# Altium PCB LLY.PcbDoc (part 2 of 2)
Units mm, origin at the board's own origin, x right, y up, seen from the top; angles counter-clockwise.
Board outline 253.36 x 130.77 mm, 2 copper layers (Top Layer, Bottom Layer), stack 0.325 mm thick; 280 components, 206 nets, 985 pads, 247 vias.
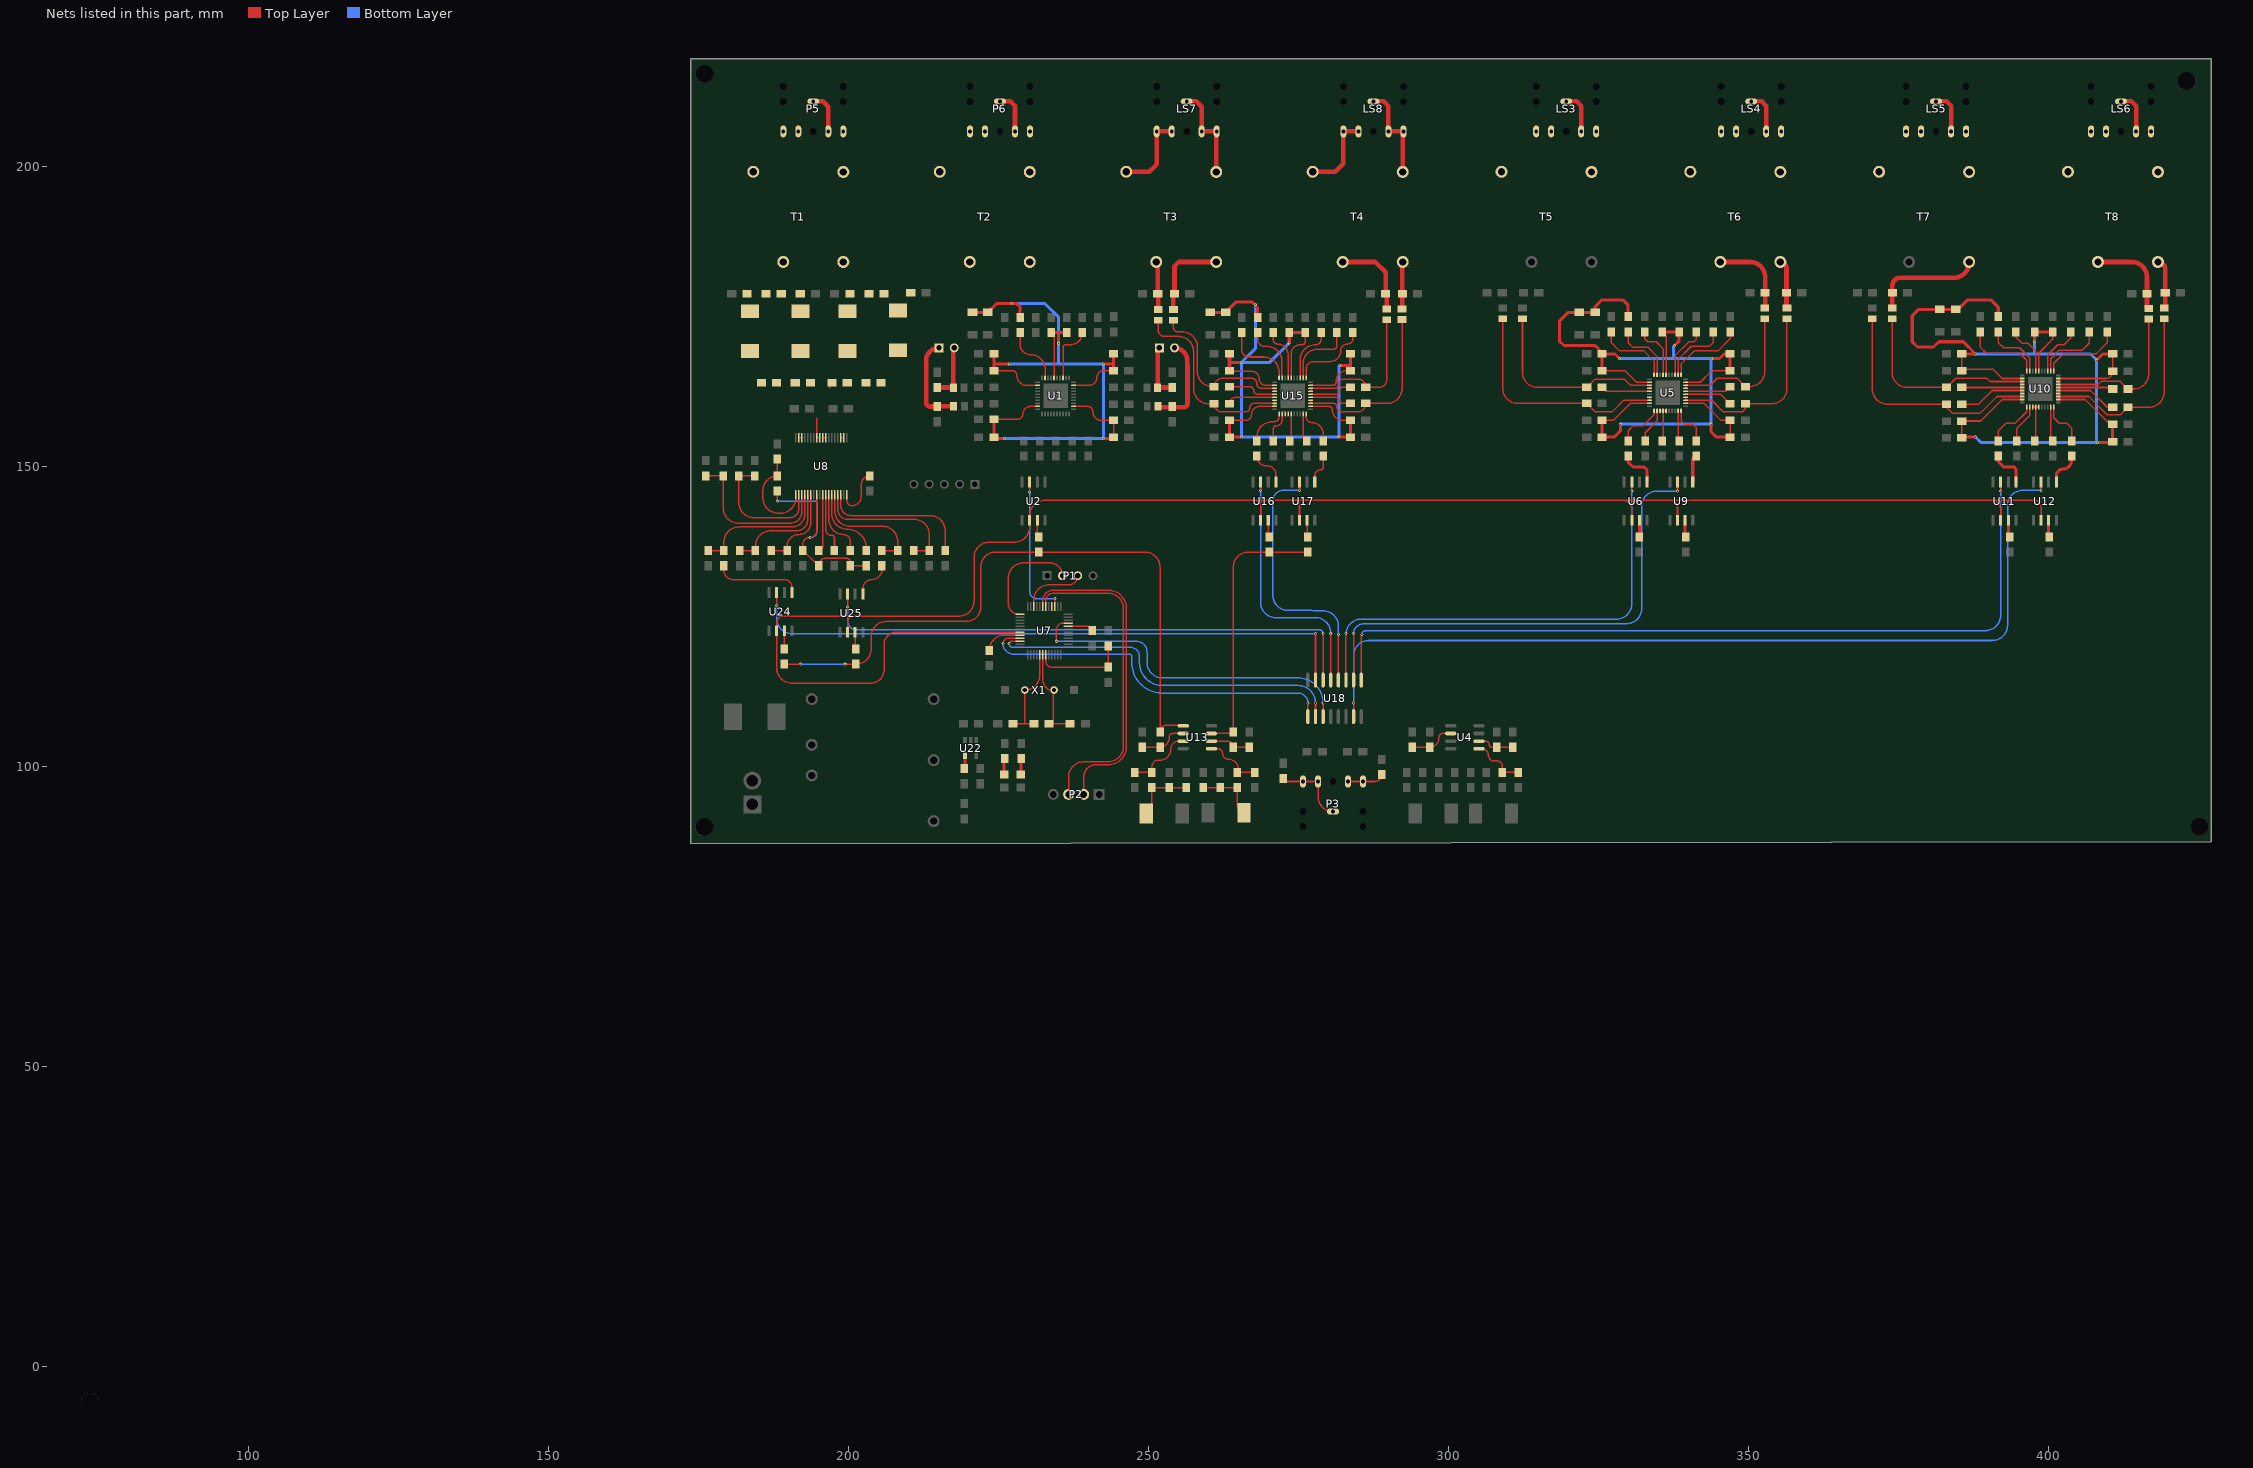
[diagram p2: the nets of this part, all layers, seen from the top]

## Via types
v1: diameter 1.016, hole 0.508, Top Layer to Bottom Layer, 114 vias
v2: diameter 0.508, hole 0.254, Top Layer to Bottom Layer, 96 vias
v3: diameter 0.381, hole 0.254, Top Layer to Bottom Layer, 29 vias
v4: diameter 0.762, hole 0.508, Top Layer to Bottom Layer, 5 vias
v5: diameter 1.016, hole 0.711, Top Layer to Bottom Layer, 3 vias

## Nets (pads, with @x,y where several pads share a name; then routed paths per layer and width w, separated by ;. In a path a pad name is that pad's centre, name@x,y a point inside that pad or via, vN(x,y) a via of type N, cw(c..) or ccw(c..) an arc to the next point about the centre after c; other vN are vias at no path point) (continued)
NetC35_2: C35.2 L13.1 U5.37 U5.38 | length 39.4
  Top Layer w0.254: L13.1@309.067,174.65 309.067,163.068 ccw(c311.607,163.068) 311.607,160.528 C35.2@323.088,160.528 324.485,159.131 327.279,159.131 329.204,161.056 U5.38@333.55,161.056 U5.37@333.55,161.556
NetC36_1: C36.1 L14.1 U5.33 U5.34 | length 33.1
  Top Layer w0.254: L14.1@312.369,174.65 312.369,165.735 ccw(c314.909,165.735) 314.909,163.195 C36.1@323.088,163.195 324.485,164.592 329.311,164.592 330.347,163.556 U5.33@333.55,163.556 U5.34@333.55,163.056
NetC36_2: C36.2 U5.35 | length 8.2
  Top Layer w0.254: C36.2@325.628,163.195 326.267,162.556 U5.35@333.55,162.556
NetC38_1: C38.1 U5.1 | length 7.8
  Top Layer w0.254: C38.1@329.982,154.305 329.982,155.992 330.835,156.845 332.486,156.845 334.3,158.659 U5.1@334.3,159.306
NetC38_2: C38.2 U6.5 | length 6.7
  Top Layer w0.508: C38.2@329.982,151.765 329.982,150.743 330.773,149.952 332.648,149.952 333.121,149.479 U6.5@333.121,147.447
NetC39_2: C39.2 U5.30 | length 12.5
  Top Layer w0.254: C39.2@327.152,172.466 327.152,170.688 328.549,169.291 332.613,169.291 334.3,167.604 U5.30@334.3,165.306
NetC40_1: C40.1 R16.1 U4.5 | length 9.2
  Top Layer w0.254: U4.5@305.118,102.997 305.562,102.997 cw(c305.562,101.854) 306.705,101.854 ccw(c307.594,101.854) 307.594,100.965 308.102,100.965 cw(c308.102,100.058) 309.009,100.058 R16.1@309.009,99.06 C40.1@311.658,99.06
NetC41_1: C41.1 U6.3 | length 2.8
  Top Layer w0.508: C41.1@331.851,138.303 U6.3@331.851,141.097
NetC42_2: C42.2 R25.1 U7.5 X1.2 | length 16
  Top Layer w0.254: C42.2@227.457,107.188 229.362,107.188 ; R25.1@230.95,107.188 229.362,107.188 ; U7.5@231.93,118.275 231.93,115.271 cw(c229.435,115.271) X1.2@229.435,112.776 229.435,107.261 cw(c229.362,107.261) 229.362,107.188
NetC43_2: C43.2 R25.2 U7.6 X1.1 | length 15.4
  Top Layer w0.254: U7.6@232.43,118.275 232.43,114.534 ccw(c234.315,114.534) X1.1@234.188,112.653 ; R25.2@233.807,107.188 R25.2@234.188,107.188 ; X1.1@234.315,112.776 ccw(c234.315,112.649) X1.1@234.188,112.653 ; C43.2@236.982,107.188 R25.2@234.188,107.188 ; R25.2@234.188,107.188 234.188,112.649 cw(c234.315,112.649) X1.1@234.188,112.653
NetC44_1: C44.1 R27.1 U7.7 | length 15.6
  Top Layer w0.254: U7.7@232.914,118.657 232.914,117.606 ccw(c233.934,117.606) 232.93,117.426 ccw(c233.934,117.606) 233.934,116.586 C44.1@243.332,116.586 R27.1@243.332,120.142
NetC45_1: C45.1 U5.2 | length 5.8
  Top Layer w0.254: C45.1@332.813,154.305 332.813,155.648 334.8,157.635 U5.2@334.8,159.306
NetC46_1: C46.1 R33.2 U8.20 | length 21.7
  Top Layer w0.254: C46.1@184.404,148.463 R33.2@181.788,148.463 181.788,144.018 ccw(c184.328,144.018) 184.328,141.478 190.246,141.478 ccw(c190.246,143.003) 191.771,143.003 U8.20@191.771,145.313
NetC47_2: C47.2 R34.2 U8.21 | length 26.7
  Top Layer w0.254: C47.2@176.276,148.463 R34.2@179.172,148.463 179.172,143.129 ccw(c181.712,143.129) 181.712,140.589 190.373,140.589 ccw(c190.373,142.487) 192.271,142.487 U8.21@192.271,145.313
NetC48_2: C48.2 R35.2 U8.19 | length 16.8
  Top Layer w0.254: C48.2@188.214,151.257 R35.2@188.214,148.463 ccw(c188.214,146.05) 185.801,146.05 185.801,144.78 ccw(c188.341,144.78) 188.341,142.24 188.731,142.24 ccw(c188.731,144.78) 191.271,144.78 U8.19@191.271,145.313
NetC49_1: C49.1 C50.2 U8.22 | length 23.4
  Top Layer w0.254: C49.1@176.657,136.017 C50.2@179.29,136.017 179.29,137.414 cw(c181.83,137.414) 181.83,139.954 190.627,139.954 ccw(c190.627,142.098) 192.771,142.098 U8.22@192.771,145.313
NetC49_N_2: C49_N.2 C50_N.2 U8.23 | length 18.7
  Top Layer w0.254: C49_N.2@181.923,136.017 C50_N.2@184.556,136.017 184.556,136.779 cw(c187.096,136.779) 187.096,139.319 191.389,139.319 ccw(c191.389,141.201) 193.271,141.201 U8.23@193.271,145.313
NetC50_1: C50.1 U24.5 | length 14.6
  Top Layer w0.254: C50.1@179.29,133.477 179.29,132.715 ccw(c180.814,132.715) 180.814,131.191 189.357,131.191 cw(c189.357,129.921) 190.627,129.921 U24.5@190.627,129.032
NetC51_1: C51.1 C53.1 L1.2 T1.1
NetC53_2: C53.2 C56.2 L2.2 T1.2
NetC54_1: C54.1 R35.1 R38.1 RG1.1 RG2.1 U8.26 | length 38.7
  Top Layer w0.254: v2(188.214,144.272) R35.1@188.214,145.923 ; U8.26@194.771,145.313 194.771,139.399 cw(c193.548,139.399) 193.548,138.176 ccw(c193.548,137.084) 192.456,137.084 C54.1@192.456,136.017 R38.1@195.072,133.477 cw(c196.342,133.477) 196.342,134.747 199.644,134.747 cw(c199.644,134.036) 200.355,134.036 RG1.1@200.355,133.477 RG2.1@202.988,133.477
  Bottom Layer w0.254: v2(188.214,144.272) 194.437,144.272 cw(c194.437,143.891) 194.818,143.891 194.818,139.319 cw(c193.675,139.319) v2(193.675,138.176)
NetC55_1: C55.1 R36.2
NetC55_2: C55.2 L2.1 U8.10 U8.11 | length 3.8
  Top Layer w0.254: 194.771,158.077 U8.11@194.771,154.813 U8.10@195.271,154.813
NetC57_2: C57.2 R37.2 U8.24 | length 14.2
  Top Layer w0.254: R37.2@187.19,136.017 C57.2@189.823,136.017 189.823,136.737 cw(c191.77,136.737) 191.77,138.684 ccw(c191.77,140.685) 193.771,140.685 U8.24@193.771,145.313
NetC58_1: C58.1 U8.29 | length 10.1
  Top Layer w0.254: U8.29@196.271,145.313 196.271,139.517 ccw(c197.231,139.517) 197.231,138.557 cw(c197.231,138.066) 197.722,138.066 C58.1@197.722,136.017
NetC59_1: C59.1 C62.1 L3.2 T2.1 | length 0.1
  Top Layer w0.254: C62.1@202.76,178.816 cw(c202.76,178.757) C62.1@202.819,178.757
NetC60_1: C60.1 U25.5 | length 6.9
  Top Layer w0.254: U25.5@202.438,128.397 U25.5@202.438,128.778 202.438,129.667 cw(c203.962,129.667) 203.962,131.191 ccw(c203.962,132.85) 205.621,132.85 C60.1@205.621,133.477
NetC60_2: C60.2 C63.1 U8.32 | length 20.2
  Top Layer w0.254: U8.32@197.771,145.313 197.771,142.589 ccw(c200.279,142.589) 200.279,140.081 205.715,140.081 cw(c205.715,137.541) 208.255,137.541 C63.1@208.255,136.017 C60.2@205.621,136.017
NetC60_N_2: C60_N.2 C63_N.1 U8.33 | length 25.4
  Top Layer w0.254: U8.33@198.271,145.313 198.271,142.851 ccw(c199.898,142.851) 199.898,141.224 210.981,141.224 cw(c210.981,138.684) 213.521,138.684 C63_N.1@213.521,136.017 C60_N.2@210.888,136.017
NetC62_2: C62.2 C65.2 L4.2 T2.2
NetC64_1: C64.1 R39.2
NetC64_2: C64.2 L4.1 U8.2 U8.3 | length 0.5
  Top Layer w0.254: U8.3@198.771,154.813 U8.2@199.271,154.813
NetC66_1: C66.1 U8.34 | length 24.9
  Top Layer w0.254: U8.34@198.771,145.313 198.771,143.494 ccw(c200.406,143.494) 200.406,141.859 213.614,141.859 cw(c213.614,139.319) 216.154,139.319 C66.1@216.154,136.017
NetC67_1: C67.1 U8.36 | length 8.9
  Top Layer w0.254: U8.36@199.771,145.313 199.771,144.399 ccw(c200.66,144.399) 200.66,143.51 ccw(c200.66,145.034) 202.184,145.034 202.184,147.066 cw(c203.581,147.066) C67.1@203.581,148.463
NetC68_1: C68.1 U25.3 | length 2.9
  Top Layer w0.254: U25.3@201.168,122.428 201.168,119.761 ccw(c201.295,119.761) C68.1@201.295,119.634
NetC69_1: C69.1 U16.3 | length 2.9
  Top Layer w0.254: U16.3@270.002,141.097 270.002,138.43 ccw(c270.129,138.43) C69.1@270.129,138.303
NetC70_1: C70.1@276.606,138.303 U17.3 | length 2.9
  Top Layer w0.254: U17.3@276.479,141.097 276.479,138.43 ccw(c276.606,138.43) C70.1@276.606,138.303
NetC70_2: C70.2@189.357,119.634 U24.3 | length 3
  Top Layer w0.254: C70.2@189.357,119.634 U24.3@189.357,122.682
NetC71_1: C71.1 U2.3 | length 2.9
  Top Layer w0.254: U2.3@231.521,141.097 231.521,138.557 ccw(c231.775,138.557) C71.1@231.775,138.303
NetC73_1: C73.1 U5.3 U5.4 U5.5 | length 6.1
  Top Layer w0.254: U5.3@335.3,159.306 U5.5@336.3,159.306 ; C73.1@335.643,154.305 335.8,154.462 U5.4@335.8,159.306
NetC74_2: C74.2 U5.27 | length 9.2
  Top Layer w0.254: C74.2@332.74,172.466 332.74,171.323 333.248,170.815 334.645,170.815 335.8,169.66 U5.27@335.8,165.306
NetC77_1: C77.1 U9.3 | length 2.9
  Top Layer w0.508: U9.3@339.471,141.097 339.471,138.43 ccw(c339.598,138.43) C77.1@339.598,138.303
NetC78_1: C78.1 U5.9 | length 5.1
  Top Layer w0.254: U5.9@338.3,159.306 338.3,154.478 C78.1@338.473,154.305
NetC79_2: C79.2 U5.22 | length 11.4
  Top Layer w0.254: U5.22@338.3,165.306 338.3,167.866 340.487,170.053 343.535,170.053 344.134,170.652 C79.2@344.134,172.466
NetC80_1: C80.1 L5.1 LS1.1 | length 15.4
  Top Layer w0.762: LS1.1@215.138,169.799 ccw(c215.138,167.64) 212.979,167.64 212.979,160.655 ccw(c213.614,160.655) 213.614,160.02 C80.1@214.884,160.02 ccw(c214.884,160.071) 214.935,160.071 L5.1@217.576,160.071
NetC81_2: C81.2 L6.2 LS1.2 | length 9.4
  Top Layer w0.762: C81.2@214.884,163.195 217.475,163.195 cw(c217.475,163.144) L6.2@217.526,163.144 217.526,169.647 cw(c217.678,169.647) LS1.2@217.678,169.799
NetC82_1: C82.1 L7.1 LS2.1 | length 9.3
  Top Layer w0.762: LS2.1@251.841,169.799 ccw(c251.841,169.52) 251.562,169.52 L7.1@251.562,163.144 cw(c251.612,163.144) 251.612,163.195 C82.1@254,163.195
NetC83_2: C83.2 L8.2 LS2.2 | length 15.9
  Top Layer w0.762: L8.2@251.612,160.071 ccw(c251.79,160.071) 251.79,159.893 255.905,159.893 ccw(c255.905,160.528) 256.54,160.528 256.54,166.878 ccw(c254.381,166.878) 256.507,167.253 256.507,167.673 ccw(c254.381,167.673) LS2.2@254.381,169.799
NetC84_1: C84.1 L9.2 T3.1 | length 8.1
  Top Layer w0.762: T3.1@251.334,184.11 251.587,183.857 C84.1@251.587,178.816 251.663,178.74 L9.2@251.663,176.174
NetC85_2: C85.2 L10.2 T3.2 | length 14.5
  Top Layer w0.762: L10.2@254.203,176.174 254.203,178.638 C85.2@254.381,178.816 254.381,183.388 255.103,184.11 T3.2@261.334,184.11
NetC86_1: C86.1 L11.1 T4.1 | length 14.1
  Top Layer w0.762: T4.1@282.407,184.11 287.822,184.11 289.56,182.372 C86.1@289.56,178.816 289.738,178.638 L11.1@289.738,176.251
NetC87_2: C87.2 L12.2 T4.2 | length 7.9
  Top Layer w0.762: L12.2@292.303,176.301 292.303,178.765 C87.2@292.354,178.816 292.354,184.057 T4.2@292.407,184.11
NetC88_1: C88.1 U5.10 | length 6.9
  Top Layer w0.254: U5.10@338.8,159.306 338.8,157.643 339.344,157.099 340.741,157.099 341.303,156.537 C88.1@341.303,154.305
NetC88_2: C88.2 U9.5 | length 4.6
  Top Layer w0.508: U9.5@340.741,147.447 340.741,151.203 cw(c341.303,151.203) C88.2@341.303,151.765
NetC89_1: C89.1 U5.21 | length 12.8
  Top Layer w0.254: U5.21@338.8,165.306 338.8,167.096 340.995,169.291 344.932,169.291 346.964,171.323 C89.1@346.964,172.466
NetC92_1: C92.1 U5.15 | length 8.1
  Top Layer w0.254: U5.15@339.55,162.056 345.385,162.056 C92.1@346.964,160.477
NetC92_2: C92.2 L16.1 U5.13 U5.14 | length 32.3
  Top Layer w0.254: U5.14@339.55,161.556 U5.13@339.55,161.056 343.896,161.056 345.821,159.131 348.996,159.131 349.504,159.639 C92.2@349.504,160.477 353.898,160.477 ccw(c353.898,163.017) 356.438,163.017 L16.1@356.438,174.65
NetC93_1: C93.1 L15.2 U5.17 U5.18 | length 25
  Top Layer w0.254: U5.17@339.55,163.056 U5.18@339.55,163.556 343.642,163.556 344.805,164.719 348.107,164.719 C93.1@349.504,163.322 350.19,163.322 ccw(c350.19,165.862) 352.73,165.862 L15.2@352.73,174.65
NetC93_2: C93.2 U5.16 | length 7.7
  Top Layer w0.254: U5.16@339.55,162.556 346.198,162.556 C93.2@346.964,163.322
NetC96_1: C96.1 L15.1 T6.1 | length 14.1
  Top Layer w0.762: T6.1@345.335,184.11 350.266,184.11 cw(c350.266,181.57) 352.806,181.57 C96.1@352.806,178.943 352.806,176.505 cw(c352.73,176.505) L15.1@352.73,176.428
NetC97_2: C97.2 L16.2 T6.2 | length 8.3
  Top Layer w0.762: T6.2@355.335,184.11 cw(c355.335,183.083) 356.362,183.083 C97.2@356.362,178.943 356.362,176.505 ccw(c356.438,176.505) L16.2@356.438,176.428
NetC98_2: C98.2 L18.2 T7.2 | length 18.9
  Top Layer w0.762: L18.2@373.964,176.428 373.964,178.892 cw(c374.015,178.892) C98.2@374.015,178.943 374.015,180.213 cw(c375.285,180.213) 375.285,181.483 384.26,181.483 ccw(c384.26,184.023) 386.8,184.023 T7.2@386.8,184.11
NetC102_1: C102.1 U10.36 | length 11
  Top Layer w0.254: C102.1@385.572,160.401 388.366,160.401 390.656,162.691 U10.36@395.653,162.691
NetC102_2: C102.2 L17.1 U10.37 U10.38 | length 40.7
  Top Layer w0.254: L17.1@370.662,174.65 370.662,162.941 ccw(c373.202,162.941) 373.202,160.401 C102.2@383.032,160.401 383.032,159.893 384.048,158.877 388.62,158.877 391.434,161.691 U10.38@395.653,161.691 U10.37@395.653,162.191
NetC103_1: C103.1 L18.1 U10.33 U10.34 | length 33.4
  Top Layer w0.254: L18.1@373.964,174.65 373.964,165.735 ccw(c376.504,165.735) 376.504,163.195 C103.1@383.032,163.195 384.556,164.719 389.763,164.719 390.291,164.191 U10.33@395.653,164.191 U10.34@395.653,163.691
NetC103_2: C103.2 U10.35 | length 10.1
  Top Layer w0.254: C103.2@385.572,163.195 385.576,163.191 U10.35@395.653,163.191
NetC105_1: C105.1 U10.1 | length 8.5
  Top Layer w0.254: C105.1@391.65,154.305 391.65,155.938 392.938,157.226 394.462,157.226 396.403,159.167 U10.1@396.403,159.941
NetC105_2: C105.2 U11.5 | length 6.5
  Top Layer w0.508: C105.2@391.65,151.765 391.65,150.847 392.532,149.965 394.23,149.965 394.589,149.606 U11.5@394.589,147.447
NetC106_2: C106.2 U10.30 | length 13
  Top Layer w0.254: C106.2@388.62,172.466 388.62,169.926 389.636,168.91 395.224,168.91 396.403,167.731 U10.30@396.403,165.941
NetC107_1: C107.1 U11.3 | length 2.9
  Top Layer w0.508: U11.3@393.319,141.097 393.319,138.557 ccw(c393.573,138.557) C107.1@393.573,138.303
NetC108_1: C108.1 U10.2 | length 6.5
  Top Layer w0.254: C108.1@394.716,154.305 394.716,156.337 396.903,158.524 U10.2@396.903,159.941
NetC109_1: C109.1 U10.3 U10.4 U10.5 | length 6.7
  Top Layer w0.254: U10.3@397.403,159.941 U10.5@398.403,159.941 ; C109.1@397.71,154.305 397.903,154.498 U10.4@397.903,159.941
NetC110_2: C110.2 U10.27 | length 8.5
  Top Layer w0.254: C110.2@394.589,172.466 394.589,171.577 395.605,170.561 396.621,170.561 397.903,169.279 U10.27@397.903,165.941
NetC113_1: C113.1 U12.3 | length 2.9
  Top Layer w0.508: U12.3@400.05,141.097 400.05,138.43 ccw(c400.177,138.43) C113.1@400.177,138.303
NetC117_1: C117.1 U15.36 | length 8.2
  Top Layer w0.254: C117.1@263.525,160.477 cw(c264.596,160.477) 264.596,161.548 U15.36@271.066,161.548
NetC117_2: C117.2 L9.1 U15.37 U15.38 | length 32.9
  Top Layer w0.254: L9.1@251.663,174.523 L9.1@251.663,174.396 251.663,172.771 ccw(c252.73,172.771) 252.73,171.704 255.016,171.704 cw(c255.016,169.164) 257.556,169.164 257.556,163.017 ccw(c260.096,163.017) 260.096,160.477 C117.2@260.985,160.477 ccw(c262.331,160.477) 262.331,159.131 266.192,159.131 ccw(c266.192,159.893) 266.954,159.893 cw(c267.609,159.893) 267.609,160.548 U15.38@271.066,160.548 U15.37@271.066,161.048
NetC118_1: C118.1 L10.1 U15.33 U15.34 | length 27.7
  Top Layer w0.254: L10.1@254.203,174.396 254.203,173.152 ccw(c254.889,173.152) 254.889,172.466 255.651,172.466 cw(c255.651,169.926) 258.191,169.926 258.191,165.862 ccw(c260.731,165.862) 260.731,163.322 C118.1@260.985,163.322 cw(c262.382,163.322) 262.382,164.719 267.208,164.719 cw(c267.208,163.83) 268.097,163.83 ccw(c268.879,163.83) 268.879,163.048 U15.33@271.066,163.048 U15.34@271.066,162.548
NetC118_2: C118.2 U15.35 | length 8.3
  Top Layer w0.254: C118.2@263.525,163.322 266.954,163.322 cw(c266.954,162.687) 267.589,162.687 ccw(c268.228,162.687) 268.228,162.048 U15.35@271.066,162.048
NetC120_1: C120.1 U15.1 | length 6.7
  Top Layer w0.254: C120.1@268.097,154.305 268.097,154.94 cw(c270.637,154.94) 270.637,157.48 270.891,157.48 ccw(c270.891,158.405) 271.816,158.405 U15.1@271.816,158.798
NetC120_2: C120.2 U16.5 | length 6.2
  Top Layer w0.254: C120.2@268.097,151.765 ccw(c269.748,151.765) 269.748,150.114 269.875,150.114 cw(c269.875,148.717) 271.272,148.717 U16.5@271.272,147.447
NetC121_2: C121.2 U15.30 | length 12.2
  Top Layer w0.254: C121.2@265.557,172.339 265.557,169.545 ccw(c266.827,169.545) 266.827,168.275 269.276,168.275 cw(c269.276,165.735) 271.816,165.735 U15.30@271.816,164.798
NetC122_1: C122.1 U15.2 | length 5.3
  Top Layer w0.254: C122.1@270.859,154.305 270.859,156.305 cw(c271.399,156.305) 271.399,156.845 ccw(c271.399,157.762) 272.316,157.762 U15.2@272.316,158.798
NetC123_1: C123.1 U15.3 U15.4 U15.5 | length 5.1
  Top Layer w0.254: C123.1@273.284,154.642 ccw(c273.621,154.642) C123.1@273.621,154.305 ccw(c273.621,154.5) 273.816,154.5 U15.5@273.816,158.798
NetC124_2: C124.2 U15.27 | length 8.9
  Top Layer w0.254: C124.2@270.855,172.339 270.855,171.105 ccw(c271.526,171.105) 271.526,170.434 cw(c271.526,168.644) 273.316,168.644 U15.27@273.316,164.798
NetC127_1: C127.1 U15.9 | length 4.8
  Top Layer w0.254: U15.9@275.816,158.798 275.816,154.873 ccw(c276.384,154.873) C127.1@276.384,154.305
NetC128_2: C128.2 U15.22 | length 11.9
  Top Layer w0.254: U15.22@275.816,164.798 275.816,167.197 cw(c278.164,167.197) 278.164,169.545 280.797,169.545 ccw(c280.797,170.198) 281.45,170.198 C128.2@281.45,172.339
NetC129_1: C129.1 U15.10 | length 6.1
  Top Layer w0.254: U15.10@276.316,158.798 276.316,158.278 ccw(c277.241,158.278) 277.241,157.353 cw(c277.241,155.448) 279.146,155.448 C129.1@279.146,154.305
NetC129_2: C129.2 U17.5 | length 5.1
  Top Layer w0.254: U17.5@277.749,147.447 277.749,148.463 cw(c278.765,148.463) 278.765,149.479 ccw(c278.765,149.86) 279.146,149.86 C129.2@279.146,151.765
NetC130_1: C130.1 U15.21 | length 13.1
  Top Layer w0.254: U15.21@276.316,164.798 276.316,166.243 cw(c277.586,166.243) 277.586,167.513 280.289,167.513 ccw(c280.289,169.291) 282.067,169.291 cw(c283.21,169.291) 283.21,170.434 ccw(c283.21,171.323) 284.099,171.323 C130.1@284.099,172.339
NetC132_1: C132.1 U15.15 | length 7.2
  Top Layer w0.254: U15.15@277.066,161.548 281.301,161.548 cw(c281.301,161.036) 281.813,161.036 ccw(c282.321,161.036) 282.321,160.528 C132.1@283.718,160.528
NetC132_2: C132.2 L12.1 U15.13 U15.14 | length 30.2
  Top Layer w0.254: U15.14@277.066,161.048 U15.13@277.066,160.548 280.904,160.548 cw(c280.904,160.02) 281.432,160.02 ccw(c282.321,160.02) 282.321,159.131 284.861,159.131 ccw(c284.861,160.528) C132.2@286.258,160.528 289.763,160.528 ccw(c289.763,163.068) 292.303,163.068 L12.1@292.303,174.523
NetC133_1: C133.1 L11.2 U15.17 U15.18 | length 25.5
  Top Layer w0.254: U15.17@277.066,162.548 U15.18@277.066,163.048 281.031,163.048 ccw(c281.031,163.83) 281.813,163.83 cw(c282.575,163.83) 282.575,164.592 284.912,164.592 cw(c284.912,163.246) C133.1@286.258,163.246 288.544,163.246 ccw(c288.544,164.44) 289.738,164.44 L11.2@289.738,174.473
NetC133_2: C133.2 U15.16 | length 7.3
  Top Layer w0.254: U15.16@277.066,162.048 281.301,162.048 ccw(c281.301,162.56) 281.813,162.56 cw(c282.499,162.56) 282.499,163.246 C133.2@283.718,163.246
NetC137_1: C137.1 U10.9 | length 5.8
  Top Layer w0.254: U10.9@400.403,159.941 400.403,154.641 C137.1@400.739,154.305
NetC138_2: C138.2 U10.22 | length 11.4
  Top Layer w0.254: U10.22@400.403,165.941 400.403,167.993 401.828,169.418 405.638,169.418 406.799,170.579 C138.2@406.799,172.466
NetC139_1: C139.1 U10.10 | length 7.6
  Top Layer w0.254: U10.10@400.903,159.941 400.903,158.151 401.828,157.226 403.098,157.226 403.86,156.464 C139.1@403.86,154.305
NetC139_2: C139.2 U12.5 | length 5.8
  Top Layer w0.508: U12.5@401.32,147.447 401.32,148.463 cw(c402.463,148.463) 402.463,149.606 ccw(c402.463,151.003) 403.86,151.003 C139.2@403.86,151.765
NetC140_1: C140.1 U10.21 | length 13.4
  Top Layer w0.254: U10.21@400.903,165.941 400.903,167.223 402.463,168.783 407.924,168.783 409.829,170.688 C140.1@409.829,172.466
NetC143_1: C143.1 U10.15 | length 10.2
  Top Layer w0.254: U10.15@401.653,162.691 407.031,162.691 409.829,159.893 C143.1@410.718,159.893
NetC143_2: C143.2 L20.1 U10.13 U10.14 | length 33.6
  Top Layer w0.254: U10.14@401.653,162.191 U10.13@401.653,161.691 406.761,161.691 409.829,158.623 411.988,158.623 C143.2@413.258,159.893 416.763,159.893 ccw(c416.763,162.433) 419.303,162.433 L20.1@419.303,174.65
NetC144_1: C144.1 L19.2 U10.17 U10.18 | length 26.9
  Top Layer w0.254: U10.18@401.653,164.191 U10.17@401.653,163.691 408.293,163.691 408.813,164.211 411.988,164.211 C144.1@413.258,162.941 414.198,162.941 ccw(c414.198,165.481) 416.738,165.481 L19.2@416.738,174.6
NetC144_2: C144.2 U10.16 | length 9.2
  Top Layer w0.254: U10.16@401.653,163.191 410.468,163.191 cw(c410.468,162.941) C144.2@410.718,162.941
NetC147_1: C147.1 L19.1 T8.1 | length 15
  Top Layer w0.762: T8.1@408.264,184.11 413.893,184.11 cw(c413.893,181.57) 416.433,181.57 C147.1@416.433,178.816 416.433,176.682 ccw(c416.738,176.682) L19.1@416.738,176.378
NetC148_2: C148.2 L20.2 T8.2 | length 8.5
  Top Layer w0.762: T8.2@418.264,184.11 cw(c418.264,182.893) 419.481,182.893 C148.2@419.481,178.943 419.481,176.606 cw(c419.303,176.606) L20.2@419.303,176.428
NetC149_1: C149.1 R21.1 R23.2 R28.2 | length 10.6
  Top Layer w0.254: C149.1@249.682,92.202 ccw(c249.682,93.145) 250.625,93.145 R23.2@250.625,96.52 R28.2@253.474,96.52 R21.1@256.322,96.52
NetC150_1: C150.1 R23.1 U13.3 | length 11.4
  Top Layer w0.254: C150.1@247.777,99.06 R23.1@250.625,99.06 250.625,100.003 cw(c251.714,100.003) 251.714,101.092 251.968,101.092 ccw(c251.968,102.87) 253.746,102.87 cw(c255.143,102.87) 255.143,104.267 U13.3@255.841,104.267
NetC151_1: C151.1 R31.1 U13.5 | length 9.6
  Top Layer w0.254: U13.5@260.541,102.997 261.62,102.997 cw(c261.62,102.235) 262.382,102.235 ccw(c263.398,102.235) 263.398,101.219 cw(c263.398,99.568) 265.049,99.568 265.049,99.06 C151.1@267.716,99.06
NetC152_1: C152.1 R31.2 R32.1 R40.2 | length 10.5
  Top Layer w0.254: R32.1@259.207,96.52 R40.2@262.019,96.52 R31.2@264.868,96.52 264.868,93.399 ccw(c265.938,93.399) C152.1@265.938,92.329
NetC166_2: C166.2 U22.4 | length 2.2
  Top Layer w0.508: C166.2@219.329,99.695 ccw(c219.329,99.827) 219.461,99.827 U22.4@219.461,101.794
NetD1_1: D1.1 R22.1 | length 3.1
  Top Layer w0.508: R22.1@225.933,101.727 225.933,98.733 ccw(c226.015,98.733) D1.1@226.015,98.651
NetD2_1: D2.1 R17.1 | length 3
  Top Layer w0.508: D2.1@228.727,98.905 ccw(c228.727,98.987) 228.809,98.987 R17.1@228.809,101.854
NetL1_1: L1.1 R36.1 U8.16 U8.17 | length 0.5
  Top Layer w0.254: U8.17@191.771,154.813 U8.16@192.271,154.813
NetL3_1: L3.1 R39.1 U8.8 U8.9 | length 1.9
  Top Layer w0.254: U8.9@195.771,154.813 U8.8@196.271,154.813 ; 196.906,163.166 cw(c197.824,163.166) R39.1@197.824,164.084
NetLS3_1: LS3.1 T5.3 | length 7
  Top Layer w0.762: LS3.1@319.659,210.867 321.39,210.867 322.159,210.098 LS3.1@322.159,205.867
NetLS3_2: LS3.2 T5.4
NetLS4_1: LS4.1 T6.3 | length 7
  Top Layer w0.762: LS4.1@350.478,210.867 352.209,210.867 352.978,210.098 LS4.1@352.978,205.867
NetLS4_2: LS4.2 T6.4
NetLS5_1: LS5.1 T7.3 | length 7
  Top Layer w0.762: LS5.1@381.296,210.867 383.027,210.867 383.796,210.098 LS5.1@383.796,205.867
NetLS5_2: LS5.2 T7.4
NetLS6_1: LS6.1 T8.3 | length 7
  Top Layer w0.762: LS6.1@412.115,210.867 413.846,210.867 414.615,210.098 LS6.1@414.615,205.867
NetLS6_2: LS6.2 T8.4
NetLS7_1: LS7.1 T3.3 | length 16.3
  Top Layer w0.762: LS7.1@256.413,210.867 258.017,210.867 258.913,209.971 LS7.1@258.913,205.867 LS7.1@261.413,205.867 261.334,205.788 T3.3@261.334,199.11
NetLS7_2: LS7.2 T3.4 | length 13.6
  Top Layer w0.762: T3.4@246.334,199.136 250.19,199.136 251.413,200.359 LS7.2@251.413,205.867 LS7.2@253.913,205.867
NetLS8_1: LS8.1 T4.3 | length 16.4
  Top Layer w0.762: LS8.1@287.528,210.867 289.259,210.867 290.028,210.098 LS8.1@290.028,205.867 LS8.1@292.528,205.867 292.407,205.746 T4.3@292.407,199.11
NetLS8_2: LS8.2 T4.4 | length 13.6
  Top Layer w0.762: T4.4@277.407,199.136 281.178,199.136 282.528,200.486 LS8.2@282.528,205.867 LS8.2@285.028,205.867
NetP1_2: P1.2 U7.37 | length 18.9
  Top Layer w0.254: U7.37@228.639,125.432 228.39,125.432 cw(c228.39,127.127) 226.695,127.127 226.695,131.445 cw(c229.235,131.445) 229.235,133.985 233.553,133.985 cw(c233.553,131.826) P1.2@235.712,131.826
NetP1_3: P1.3 U7.34 | length 10.7
  Top Layer w0.254: U7.34@230.914,126.707 230.914,127.762 cw(c233.454,127.762) 233.454,130.302 236.728,130.302 ccw(c236.728,131.826) P1.3@238.252,131.826
NetP3_1: P3.1 R11.2 | length 12.5
  Top Layer w0.254: R11.2@272.542,98.044 ccw(c273.05,98.044) 273.05,97.536 P3.1@275.797,97.536 P3.1@278.297,97.536 278.297,95.036 ccw(c280.797,95.036) P3.1@280.797,92.536
NetP3_2: P3.2 R7.2 | length 6.3
  Top Layer w0.254: P3.2@283.297,97.536 P3.2@285.797,97.536 287.782,97.536 ccw(c287.782,98.679) R7.2@288.925,98.679
NetP5_1: P5.1 T1.3 | length 7
  Top Layer w0.762: P5.1@194.183,210.867 195.787,210.867 196.683,209.971 P5.1@196.683,205.867
NetP5_2: P5.2 T1.4
NetP6_1: P6.1 T2.3 | length 7
  Top Layer w0.762: P6.1@225.298,210.867 227.029,210.867 227.798,210.098 P6.1@227.798,205.867
NetP6_2: P6.2 T2.4
NetR1_1: R1.1 U1.23 | length 9.8
  Top Layer w0.254: U1.23@235.819,164.671 U1.23@235.819,164.798 235.819,169.906 cw(c236.22,169.906) 236.22,170.307 237,170.307 ccw(c237,172.339) R1.1@239.032,172.339
NetR2_2: R2.2 R3.1 U4.2 | length 7.8
  Top Layer w0.254: R3.1@294.005,103.251 R2.2@296.926,103.251 ccw(c296.926,104.775) 298.45,104.775 298.45,104.902 cw(c299.085,104.902) 299.085,105.537 U4.2@300.418,105.537
NetR8_2: R8.2 U5.29 | length 10.6
  Top Layer w0.254: R8.2@329.982,172.466 329.982,170.652 330.708,169.926 333.248,169.926 334.8,168.374 U5.29@334.8,165.306
NetR9_2: R9.2 R13.1 U4.6 | length 6.2
  Top Layer w0.254: U4.6@305.118,104.267 306.197,104.267 cw(c306.197,103.632) 306.832,103.632 ccw(c307.213,103.632) 307.213,103.251 R9.2@308.102,103.251 R13.1@310.769,103.251
NetR10_1: R10.1 U5.23 | length 9.1
  Top Layer w0.254: U5.23@337.8,165.306 337.8,168.509 340.106,170.815 340.995,170.815 341.303,171.123 R10.1@341.303,172.466
NetR12_2: R12.2 U10.29 | length 10.3
  Top Layer w0.254: R12.2@391.65,172.466 391.65,170.706 392.557,169.799 395.224,169.799 396.903,168.12 U10.29@396.903,165.941
NetR14_1: R14.1 U10.23 | length 8.7
  Top Layer w0.254: U10.23@399.903,165.941 399.903,168.636 401.574,170.307 402.59,170.307 403.769,171.486 R14.1@403.769,172.466
NetR19_2: R19.2 R20.1 U13.2 | length 8.2
  Top Layer w0.254: R20.1@249.047,103.251 R19.2@251.968,103.251 ccw(c251.968,104.775) 253.492,104.775 253.492,104.902 cw(c254.127,104.902) 254.127,105.537 U13.2@255.841,105.537
NetR24_2: R24.2 U7.20 | length 4.4
  Top Layer w0.254: U7.20@236.689,123.432 239.915,123.432 cw(c239.915,122.682) R24.2@240.665,122.682
NetR26_1: R26.1 U7.44 | length 6.6
  Top Layer w0.254: R26.1@223.52,119.38 223.52,119.392 cw(c226.06,119.392) 226.06,121.932 U7.44@228.639,121.932
NetR29_2: R29.2 R30.1 U13.6 | length 6.9
  Top Layer w0.254: U13.6@260.541,104.267 263.144,104.267 cw(c263.144,103.251) R29.2@264.16,103.251 R30.1@266.827,103.251
NetR38_2: R38.2 U8.28 | length 9.7
  Top Layer w0.254: R38.2@195.072,136.017 ccw(c195.072,136.716) 195.771,136.716 U8.28@195.771,145.313
NetR42_1: R42.1 U15.23 | length 9.5
  Top Layer w0.254: U15.23@275.316,164.798 275.316,167.767 cw(c277.856,167.767) 277.856,170.307 277.876,170.307 ccw(c277.876,171.232) 278.801,171.232 R42.1@278.801,172.339
NetR100_2: R100.2 U1.29 | length 9.9
  Top Layer w0.254: R100.2@228.654,172.339 228.654,170.38 ccw(c230.378,170.38) 230.378,168.656 cw(c230.378,166.215) 232.819,166.215 U1.29@232.819,164.798
NetR101_2: R101.2 U15.29 | length 10
  Top Layer w0.254: R101.2@268.224,172.339 268.224,171.196 ccw(c269.367,171.196) 269.367,170.053 269.748,170.053 cw(c269.748,167.513) 272.288,167.513 272.288,164.826 ccw(c272.316,164.826) U15.29@272.316,164.798
NetRG1_2: RG1.2 U8.30 | length 11.3
  Top Layer w0.254: U8.30@196.771,145.313 196.771,141.176 ccw(c199.263,141.176) 199.263,138.684 cw(c199.263,137.592) 200.355,137.592 RG1.2@200.355,136.017
NetRG2_2: RG2.2 U8.31 | length 12.3
  Top Layer w0.254: U8.31@197.271,145.313 197.271,142.113 ccw(c199.811,142.113) 199.811,139.573 cw(c199.811,136.311) RG2.2@203.073,136.311
PB7: U2.2 U6.2 U7.43 U9.2 U11.2 U12.2 U16.2 U17.2 U24.2 U25.2 | length 308.2
  Top Layer w0.254: U25.2@199.898,122.428 199.898,124.206 cw(c200.787,124.206) 200.787,125.095 ; U7.43@228.639,122.432 208.03,122.432 ccw(c208.03,120.396) 205.994,120.396 205.994,116.205 cw(c203.708,116.205) 203.708,113.919 190.627,113.919 cw(c190.627,116.459) 188.087,116.459 U24.2@188.087,122.682 188.087,123.952 cw(c189.23,123.952) 189.23,125.095 200.787,125.095 ; U16.2@268.732,141.097 268.732,143.51 ccw(c267.843,143.51) 267.843,144.399 ; U17.2@275.209,141.097 275.209,143.764 ccw(c274.574,143.764) 274.574,144.399 ; U6.2@330.581,141.097 330.581,142.875 ccw(c329.057,142.875) 329.057,144.399 ; U9.2@338.201,141.097 338.201,143.256 ccw(c337.058,143.256) 337.058,144.399 ; U11.2@392.049,141.097 392.049,142.875 ccw(c390.525,142.875) 390.525,144.399 ; U12.2@398.78,141.097 398.78,143.256 ccw(c397.637,143.256) 397.637,144.399 390.525,144.399 ; 200.787,125.095 218.44,125.095 ccw(c218.44,127.635) 220.98,127.635 220.98,134.874 cw(c223.52,134.874) 223.52,137.414 227.711,137.414 ccw(c227.711,139.954) 230.251,139.954 U2.2@230.251,141.097 230.251,141.859 cw(c232.791,141.859) 232.791,144.399 267.843,144.399 ; 267.843,144.399 274.574,144.399 ; 274.574,144.399 329.057,144.399 ; 329.057,144.399 337.058,144.399 ; 337.058,144.399 390.525,144.399
PB8: U7.45 U18.1 | length 62.5
  Top Layer w0.254: v2(225.806,120.523) cw(c226.715,120.523) 226.715,121.432 U7.45@228.639,121.432 ; U18.1@276.606,108.344 v2(276.606,110.617)
  Bottom Layer w0.254: v2(225.806,120.523) ccw(c227.584,120.523) 227.584,118.745 246.888,118.745 cw(c246.888,118.364) 247.269,118.364 247.269,117.348 ccw(c252.349,117.348) 252.349,112.268 274.955,112.268 cw(c274.955,110.617) v2(276.606,110.617)
PB9: U7.46 U18.2 | length 61.5
  Top Layer w0.254: v2(226.822,120.523) cw(c227.231,120.523) 227.082,120.904 cw(c227.231,120.523) 227.231,120.932 U7.46@228.639,120.932 ; U18.2@277.876,108.344 v2(277.876,110.617)
  Bottom Layer w0.254: v2(226.822,120.523) ccw(c227.457,120.523) 227.457,119.888 247.015,119.888 cw(c247.015,118.364) 248.539,118.364 248.539,117.348 ccw(c252.349,117.348) 252.349,113.538 274.955,113.538 cw(c274.955,110.617) v2(277.876,110.617)
PB10: U7.21 U18.3 | length 57.9
  Top Layer w0.254: v2(234.696,120.904) 234.696,122.809 cw(c235.819,122.809) 235.819,123.932 U7.21@236.689,123.932 ; U18.3@279.146,108.344 v2(279.146,110.617)
  Bottom Layer w0.254: v2(234.696,120.904) 248.031,120.904 cw(c248.031,119.126) 249.809,119.126 249.809,117.348 ccw(c252.349,117.348) 252.349,114.808 274.955,114.808 cw(c274.955,110.617) v2(279.146,110.617)
PB14: U2.7 U7.27 | length 24.5
  Top Layer w0.254: v2(230.251,145.796) U2.7@230.251,147.447 ; U7.27@234.414,126.707 234.414,127.988 v2(234.442,128.016)
  Bottom Layer w0.254: v2(230.251,145.796) 230.251,129.159 ccw(c231.394,129.159) 231.394,128.016 v2(234.442,128.016)
PB15: U7.28
PVCC12: C114.1 C115.2 C116.2 C119.1 C125.1 C126.1 C131.1 C134.2 C135.1 C136.2 D5.2 D6.2 R101.1 U15.12 U15.19 U15.26 U15.32 U15.39 | length 137.6
  Top Layer w0.254: C115.2@263.525,157.48 C115.2@263.525,157.709 266.294,157.709 ccw(c266.294,158.623) 267.208,158.623 cw(c268.633,158.623) 268.633,160.048 U15.39@271.066,160.048 ; C114.1@263.525,165.862 267.335,165.862 cw(c267.335,164.719) 268.478,164.719 ccw(c269.649,164.719) 269.649,163.548 U15.32@271.066,163.548 ; R101.1@268.097,174.752 cw(c268.224,174.752) R101.1@268.224,174.879 ; U15.26@273.816,164.798 273.816,168.783 cw(c275.34,168.783) 274.259,169.858 cw(c275.34,168.783) 275.058,170.281 cw(c275.34,168.783) 275.34,170.307 275.59,170.307 ccw(c275.59,170.869) 276.152,170.869 C126.1@276.152,172.339 ; U15.12@277.066,160.048 280.134,160.048 cw(c280.134,159.512) 280.67,159.512 ccw(c282.473,159.512) 282.473,157.709 C131.1@283.718,157.709 C131.1@283.718,157.353 ; U15.19@277.066,163.548 280.769,163.548 ccw(c280.769,164.084) 281.305,164.084 cw(c283.235,164.084) 283.235,166.014 C134.2@283.718,166.014 C134.2@283.718,166.243
  Top Layer w0.508: D5.2@260.35,175.708 D6.2@262.89,175.708 264.601,177.419 267.335,177.419 v2@267.779,176.975 ; C115.2@263.525,157.48 C116.2@263.525,154.94 v2(265.557,154.94) ; 263.525,167.513 263.652,167.386 v2(265.557,167.386) ; v2(267.843,177.038) v2@267.779,176.975 ; R101.1@268.224,174.879 268.224,176.53 v2@267.779,176.975 ; v2(273.485,170.615) 273.504,170.615 C125.1@273.504,172.339 C126.1@276.152,172.339 ; v2(281.813,154.94) C135.1@283.718,154.94 C131.1@283.718,157.353 ; v2(281.94,166.878) 283.718,166.878 ; C134.2@283.718,166.243 283.718,166.878 ; C136.2@283.718,168.783 283.718,166.878
  Top Layer w0.635: C114.1@263.525,165.862 C114.1@263.525,166.014 263.525,167.513 C119.1@263.525,168.783
  Bottom Layer w0.508: v2(267.843,177.038) 267.843,169.672 v2(265.557,167.386) ; v2(273.485,170.615) 270.256,167.386 v2(265.557,167.386) ; v2(281.94,166.878) 281.813,166.751 v2(281.813,154.94) v2(265.557,154.94) v2(265.557,167.386)
PVCC34: C32.1 C33.2 C34.2 C37.1 C75.1 C76.1 C90.1 C91.2 C94.1 C95.2 D7.2 D8.2 R8.1 U5.12 U5.19 U5.26 U5.32 U5.39 | length 145.5
  Top Layer w0.254: C34.2@325.628,154.94 C34.2@325.628,155.321 ; C33.2@325.628,157.709 327.508,157.709 330.355,160.556 U5.39@333.55,160.556 ; C37.1@325.628,166.014 329.413,166.014 331.371,164.056 U5.32@333.55,164.056 ; C75.1@335.661,172.466 336.3,171.827 336.3,170.293 U5.26@336.3,165.306 ; U5.12@339.55,160.556 342.618,160.556 345.465,157.709 C90.1@346.964,157.709 C94.1@346.964,154.94 ; U5.19@339.55,164.056 341.983,164.056 343.941,166.014 C91.2@346.964,166.014 C91.2@346.964,166.243
  Top Layer w0.508: C34.2@325.628,154.94 327.66,154.94 328.676,155.956 v2(328.676,157.099) ; C34.2@325.628,155.321 C33.2@325.628,157.709 ; C37.1@325.628,166.014 C32.1@325.628,168.783 ; v2(328.549,168.021) 327.787,168.783 C32.1@325.628,168.783 ; R8.1@329.982,175.006 329.982,176.875 329.057,177.8 325.628,177.8 324.485,176.657 D8.2@324.485,175.708 D7.2@321.818,175.708 319.98,175.708 318.516,174.244 318.516,170.942 319.278,170.18 324.485,170.18 325.628,169.037 C32.1@325.628,168.783 ; C75.1@335.661,172.466 C76.1@338.473,172.466 338.473,170.96 v2(337.693,170.18) ; v2(343.789,157.099) 343.789,155.829 344.678,154.94 C94.1@346.964,154.94 ; v2(343.916,168.021) 345.186,168.021 345.948,168.783 C95.2@346.964,168.783 C91.2@346.964,166.243
  Bottom Layer w0.508: v2(328.549,168.021) 337.566,168.021 ; v2(328.676,157.099) v2(343.789,157.099) 343.789,167.894 v2(343.916,168.021) 337.566,168.021 ; v2(337.693,170.18) 337.566,170.053 337.566,168.021
PVCC56: C99.1 C100.2 C101.2 C104.1 C111.1 C112.1 C141.1 C142.2 C145.1 C146.2 D9.2 D10.2 R12.1 U10.12 U10.19 U10.26 U10.32 U10.39 | length 167.1
  Top Layer w0.254: C100.2@385.572,155.194 C101.2@385.572,157.607 388.747,157.607 392.331,161.191 U10.39@395.653,161.191 ; C104.1@385.572,168.783 385.572,166.243 390.779,166.243 392.331,164.691 U10.32@395.653,164.691 ; U10.26@398.403,165.941 398.403,168.914 400.739,171.25 C112.1@400.739,172.466 ; U10.12@401.653,161.191 406.118,161.191 410.21,157.099 C145.1@410.718,157.099 ; U10.19@401.653,164.691 409.547,164.691 ccw(c409.547,165.862) C146.2@410.718,165.862 C142.2@410.718,168.783
  Top Layer w0.508: C100.2@385.572,155.194 385.826,154.94 v2(387.858,154.94) ; C104.1@385.572,168.783 v2(387.858,168.783) 385.826,170.815 381.762,170.815 380.873,169.926 378.206,169.926 377.317,170.815 377.317,175.133 378.4,176.216 D9.2@381.889,176.216 D10.2@384.556,176.216 385.004,176.216 386.588,177.8 390.398,177.8 391.65,176.548 R12.1@391.65,175.006 ; v2(397.691,170.869) 397.71,170.869 C111.1@397.71,172.466 C112.1@400.739,172.466 ; v2(408.051,167.767) 409.067,168.783 C142.2@410.718,168.783 ; v2(408.178,154.051) 410.591,154.051 C141.1@410.718,154.178 C145.1@410.718,157.099
  Bottom Layer w0.508: v2(387.858,154.94) 388.747,154.051 v2(408.178,154.051) 408.051,154.178 v2(408.051,167.767) 407.035,168.783 397.891,168.783 ; v2(387.858,168.783) 397.764,168.783 397.691,168.856 v2(397.691,170.869)
PVCCA: C1.1 C2.2 C3.2 C6.1 C12.1 C13.1 C18.1 C21.2 C22.1 C23.2 D3.2 D4.2 R100.1 U1.12 U1.19 U1.26 U1.32 U1.39 | length 136.1
  Top Layer w0.254: C2.2@224.282,157.607 C2.2@224.282,157.861 228.219,157.861 ccw(c228.219,158.75) 229.108,158.75 cw(c230.406,158.75) 230.406,160.048 U1.39@231.569,160.048 ; C6.1@224.282,165.989 227.33,165.989 cw(c227.33,165.227) 228.092,165.227 ccw(c229.771,165.227) 229.771,163.548 U1.32@231.569,163.548 ; C12.1@234.125,172.339 cw(c234.125,172.145) 234.319,172.145 U1.26@234.319,164.798 ; U1.12@237.569,160.048 239.875,160.048 cw(c239.875,159.131) 240.792,159.131 ccw(c242.214,159.131) 242.214,157.709 C18.1@244.221,157.709 C22.1@244.221,154.94 ; U1.19@237.569,163.548 240.129,163.548 ccw(c240.129,164.846) 241.427,164.846 cw(c242.595,164.846) 242.595,166.014 C23.2@244.221,166.014
  Top Layer w0.508: D3.2@220.726,175.708 D4.2@223.266,175.708 224.723,177.165 v2(227.203,177.165) 228.092,177.165 228.654,176.603 R100.1@228.654,174.879 ; C2.2@224.282,157.607 C3.2@224.282,154.94 224.536,154.686 v2(226.06,154.686) ; C6.1@224.282,165.989 224.282,167.132 ; C1.1@224.282,168.783 224.282,167.132 ; v2(226.822,167.132) 224.282,167.132 ; C12.1@233.843,172.339 234.125,172.339 235.077,172.339 ; v2(235.077,170.561) 235.077,172.339 ; C13.1@236.438,172.339 235.077,172.339 ; v2(242.57,154.686) 243.967,154.686 C22.1@244.221,154.94 ; v2(242.57,167.132) 244.094,167.132 ; C23.2@244.221,166.014 244.094,166.141 244.221,166.268 C21.2@244.221,168.783
  Bottom Layer w0.508: v2(226.06,154.686) v2(242.57,154.686) v2(242.57,167.132) 235.077,167.132 ; v2(226.822,167.132) 235.077,167.132 ; v2(227.203,177.165) 232.791,177.165 235.077,174.879 v2(235.077,170.561) 235.077,167.132
RIGHT1: C68.2 C70.1@189.357,117.094 C71.2 R19.1 U13.1 | length 110.5
  Top Layer w0.254: C70.1@189.357,117.094 v2(192.024,117.094) ; v2(199.517,117.094) C68.2@201.295,117.094 ccw(c201.295,119.634) 203.835,119.634 203.835,121.666 cw(c206.375,121.666) 206.375,124.206 219.583,124.206 ccw(c219.583,126.746) 222.123,126.746 222.123,133.35 cw(c224.536,133.35) 224.536,135.763 C71.2@231.775,135.763 249.428,135.763 cw(c249.428,133.223) 251.968,133.223 R19.1@251.968,105.791 cw(c253.111,105.791) 253.111,106.934 255.714,106.934 cw(c255.714,106.807) U13.1@255.841,106.807
  Bottom Layer w0.254: v2(192.024,117.094) v2(199.517,117.094)
RIGHT2: C69.2 C70.2@276.606,135.763 R29.1 U13.7 | length 45.1
  Top Layer w0.254: U13.7@260.541,105.537 263.906,105.537 ccw(c263.906,105.791) R29.1@264.16,105.791 264.16,133.223 cw(c266.7,133.223) 266.7,135.763 C69.2@270.129,135.763 C70.2@276.606,135.763
USART1_RX: P2.2 U7.31 | length 53.5
  Top Layer w0.254: U7.31@232.414,126.707 232.414,127.631 cw(c234.188,127.631) 234.188,129.405 243.332,129.405 cw(c243.332,126.365) 246.372,126.365 246.372,103.378 cw(c243.332,103.378) 243.332,100.338 241.3,100.338 ccw(c241.3,98.306) 239.268,98.306 P2.2@239.268,95.377
USART1_TX: P2.3 U7.30 | length 54
  Top Layer w0.254: U7.30@232.914,126.707 232.914,127.631 cw(c234.188,127.631) 234.188,128.905 243.332,128.905 cw(c243.332,126.365) 245.872,126.365 245.872,103.378 cw(c243.332,103.378) 243.332,100.838 239.268,100.838 ccw(c239.268,98.298) 236.728,98.298 P2.3@236.728,95.377
Y0: U18.15 U24.7 | length 103.3
  Top Layer w0.254: v2(188.087,126.873) U24.7@188.087,129.032 ; U18.15@277.876,114.439 v2(277.876,122.174)
  Bottom Layer w0.254: v2(188.087,126.873) 188.087,124.714 ccw(c190.627,124.714) 190.627,122.174 v2(277.876,122.174)
Y1: U18.14 U25.7 | length 92.7
  Top Layer w0.254: v2(199.898,126.619) U25.7@199.898,128.778 ; U18.14@279.146,114.439 v2(279.146,122.174)
  Bottom Layer w0.254: v2(199.898,126.619) 199.898,124.333 ccw(c201.422,124.333) 201.422,122.809 278.511,122.809 cw(c278.511,122.174) v2(279.146,122.174)
Y2: U16.7 U18.13 | length 42.5
  Top Layer w0.254: v2(268.732,146.05) U16.7@268.732,147.447 ; U18.13@280.416,114.439 v2(280.416,122.174)
  Bottom Layer w0.254: v2(268.732,146.05) 268.732,127.381 ccw(c271.272,127.381) 271.272,124.841 277.876,124.841 cw(c277.876,122.301) 280.416,122.301 v2(280.416,122.174)
Y3: U17.7 U18.12 | length 45.4
  Top Layer w0.254: v2(275.209,146.05) U17.7@275.209,147.447 ; U18.12@281.686,114.439 v2(281.686,122.047)
  Bottom Layer w0.254: v2(275.209,146.05) 272.542,146.05 ccw(c272.542,144.272) 270.764,144.272 270.764,128.573 ccw(c273.304,128.573) 273.304,126.033 277.251,126.033 ccw(c277.749,128.524) 277.749,125.984 279.146,125.984 cw(c279.146,123.444) 281.686,123.444 v2(281.686,122.047)
Y4: U6.7 U18.11 | length 78.7
  Top Layer w0.254: U18.11@282.956,114.439 v2(282.956,122.174) ; v2(330.581,145.923) U6.7@330.581,147.447
  Bottom Layer w0.254: v2(282.956,122.174) 282.956,122.047 cw(c285.496,122.047) 285.496,124.587 328.041,124.587 ccw(c328.041,127.127) 330.581,127.127 v2(330.581,145.923)
Y5: U9.7 U18.10 | length 84.1
  Top Layer w0.254: U18.10@284.226,114.439 v2(284.226,122.174) ; v2(338.201,145.923) U9.7@338.201,147.447
  Bottom Layer w0.254: v2(284.226,122.174) cw(c285.877,122.174) 285.877,123.825 329.692,123.825 ccw(c329.692,126.365) 332.232,126.365 332.232,143.383 cw(c334.772,143.383) 332.748,144.918 cw(c334.772,143.383) 334.772,145.923 v2(338.201,145.923)
Y6: U11.7 U18.9 | length 138.1
  Top Layer w0.254: U18.9@285.496,114.439 285.496,121.92 cw(c285.623,121.92) v2(285.623,122.047) ; v2(392.049,145.923) U11.7@392.049,147.447
  Bottom Layer w0.254: v2(285.623,122.047) cw(c286.258,122.047) 286.258,122.682 389.509,122.682 ccw(c389.509,125.222) 392.049,125.222 v2(392.049,145.923)
Y7: U12.7 U18.7 | length 150.4
  Top Layer w0.254: U18.7@284.226,108.344 v2(284.226,110.617) ; v2(398.78,146.05) U12.7@398.78,147.447
  Bottom Layer w0.254: v2(284.226,110.617) 284.226,118.491 cw(c286.766,118.491) 286.766,121.031 390.652,121.031 ccw(c390.652,123.571) 393.192,123.571 393.192,143.51 cw(c395.732,143.51) 395.732,146.05 v2(398.78,146.05)
pads on no net: LS3.0 LS4.0 LS5.0 LS6.0 LS7.0 LS8.0 P2.1 P3.0 P5.0 P6.0 U1.41 U5.41 U7.1 U7.2 U7.3 U7.4 U7.10 U7.11 U7.12 U7.13 U7.14 U7.15 U7.16 U7.17 U7.18 U7.19 U7.22 U7.25 U7.26 U7.29 U7.32 U7.33 U7.38 U7.39 U7.40 U7.41 U8.25 U10.41 U15.41 U21.1 U21.5 X1.

## Polygon pours and split planes (outlines as drawn)
DGND on Bottom Layer "Bottom Layer-No Net" (solid, remove dead copper, pour order 6): 167.259,231.267 168.529,229.997 436.499,229.997 436.499,81.534 425.577,70.612 415.417,60.452 167.259,60.452
DGND on Top Layer "Bottom Layer-No Net" (solid, remove dead copper, pour order 14): 318.516,127.127 319.151,128.143 319.913,129.159 320.294,129.794 340.233,129.794 341.503,128.27 341.503,118.11 341.503,116.967 340.106,115.57 339.344,114.808 322.199,114.808 320.802,114.808 318.516,117.094
DGND on Top Layer "Bottom Layer-No Net" (solid, remove dead copper, pour order 12): 254,126.746 254.381,127.635 254.762,128.397 261.62,128.397 262.509,127.508 262.509,118.491 262.509,118.237 261.493,117.221 261.239,116.967 255.016,116.967 254.762,116.967 254,117.729

## Keep-outs
Keep-Out Layer:
  the board outline again, w0.2

## Other copper
Top Layer:
  rectangle net NetLS6_1: 413.967,197.993 418.285,207.01
  rectangle net NetLS6_2: 400.812,197.866 410.337,206.756
  rectangle net NetLS5_1: 383.148,197.993 387.466,207.01
  rectangle net NetLS5_2: 369.993,197.866 379.518,206.756
  rectangle net NetLS4_1: 352.33,197.993 356.648,207.01
  rectangle net NetLS4_2: 339.175,197.866 348.7,206.756
  rectangle net NetLS3_1: 321.511,197.993 325.829,207.01
  rectangle net NetLS3_2: 308.356,197.866 317.881,206.756
  rectangle net DGND: 197.612,154.178 198.374,157.861
  rectangle net DGND: 192.659,154.051 193.421,157.734
  rectangle net DGND: 280.162,102.362 281.94,109.347
  rectangle net NetC10_1: 233.172,158.369 234.319,159.131
  rectangle net NetC123_1: 272.669,158.369 273.816,159.131
  rectangle net NetL1_1: 182.118,156.337 186.182,163.957
  rectangle net NetL1_1: 182.245,156.337 192.405,158.369
  rectangle net NetC64_2: 204.597,156.21 209.677,164.846
  rectangle net NetC64_2: 198.628,156.21 209.677,158.242
  rectangle net 12V: 193.675,154.051 194.31,160.274
  rectangle net 12V: 196.723,154.051 197.358,160.274
  rectangle net NetC53_2: 191.135,177.927 193.04,185.674
  rectangle net NetC62_2: 206.883,177.673 210.058,182.118
  rectangle net NetC62_2: 206.883,180.34 227.203,182.118
  rectangle net NetC59_1: 201.93,178.181 204.343,185.674
  rectangle net NetC64_1: 199.009,163.195 203.835,165.989
  rectangle net NetC55_1: 187.325,163.068 191.897,165.989
  rectangle net NetL1_1: 182.118,163.322 186.182,170.434
  rectangle net NetC55_2: 193.04,163.83 194.818,170.434
  rectangle net NetC55_2: 192.913,168.148 194.437,170.434
  rectangle net NetL3_1: 196.342,163.449 198.374,170.434
  rectangle net NetL3_1: 196.723,168.148 199.898,170.434
  rectangle net NetC64_2: 204.597,163.322 209.677,170.307
  rectangle net NetC53_2: 188.087,174.752 193.04,179.578
  rectangle net NetC59_1: 199.898,174.625 203.2,179.451
  rectangle net NetC62_2: 206.629,174.752 210.058,179.451
  rectangle net NetL1_1: 191.643,154.051 192.405,157.099
  rectangle net NetC55_2: 194.564,154.051 195.326,170.434
  rectangle net NetL3_1: 195.707,154.051 196.342,170.434
  rectangle net NetC64_2: 198.628,154.051 199.39,157.607
  rectangle net NetC51_1: 182.245,174.879 187.071,185.547
  rectangle net 12V: 182.372,96.139 195.453,101.981
  rectangle net 12V: 186.563,96.647 189.611,110.49
  rectangle net NetC51_1: 184.912,182.626 190.5,185.547
  rectangle net NetC53_2: 192.786,182.753 200.914,185.674
  rectangle net NetC59_1: 201.93,182.626 221.742,185.674
  rectangle net NetC62_2: 223.266,182.626 231.648,185.674
  rectangle net NetC62_2: 223.266,180.34 227.33,185.674
  rectangle net NetP6_1: 227.203,197.993 231.394,207.264
  rectangle net NetP6_2: 213.614,197.866 223.52,207.264
  rectangle net NetP5_2: 182.499,197.866 192.405,207.264
  rectangle net NetP5_1: 195.834,197.993 200.152,207.137
  rectangle net NetLS7_2: 244.602,197.739 254.381,207.518
  rectangle net NetLS7_1: 258.318,197.866 262.509,207.518
  rectangle net NetLS8_2: 276.225,197.866 285.75,206.756
  rectangle net NetLS8_1: 289.38,197.993 293.698,207.01

## Silkscreen, mask and mechanical layers (free items; w line width, h text height)
Top Overlay:
  text "SWC" at 236.22,133.477 h1 r90
  text "VCC" at 241.3,133.477 h1 r90
  text "SWD" at 238.887,133.35 h1 r90
  text "GND" at 228.854,131.191 h1
  text "12V" at 187.452,97.282 h1
  text "GND" at 232.537,96.901 h1
  text "TX" at 235.966,96.901 h1
  text "RX" at 238.76,96.774 h1
  text "GND" at 187.579,93.218 h1

## Text inside footprints (layer, text, board x,y; h text height)
L5: Mechanical 15 "1" at 218.301,159.621 h0.75
L6: Mechanical 15 "1" at 218.579,163.594 h0.75 r180
L7: Mechanical 15 "1" at 250.837,163.594 h0.75 r180
L8: Mechanical 15 "1" at 250.559,159.621 h0.75
L9: Mechanical 15 "1" at 252.113,175.121 h0.75 r90
L10: Mechanical 15 "1" at 254.653,175.121 h0.75 r90
L11: Mechanical 15 "1" at 289.288,175.526 h0.75 r270
L12: Mechanical 15 "1" at 292.753,175.248 h0.75 r90
L13: Mechanical 15 "1" at 309.517,175.375 h0.75 r90
L14: Mechanical 15 "1" at 312.819,175.375 h0.75 r90
L15: Mechanical 15 "1" at 352.28,175.704 h0.75 r270
L16: Mechanical 15 "1" at 356.888,175.375 h0.75 r90
L17: Mechanical 15 "1" at 371.112,175.375 h0.75 r90
L18: Mechanical 15 "1" at 374.414,175.375 h0.75 r90
L19: Mechanical 15 "1" at 416.288,175.653 h0.75 r270
L20: Mechanical 15 "1" at 419.753,175.375 h0.75 r90